# Altium PCB bricks power v1.PcbDoc
Units mm, origin at the board's own origin, x right, y up, seen from the top; angles counter-clockwise.
Board outline 90 x 45 mm, 2 copper layers (Top Layer, Bottom Layer), stack 1.6 mm thick; 3 components, 3 nets, 13 pads, 0 vias.
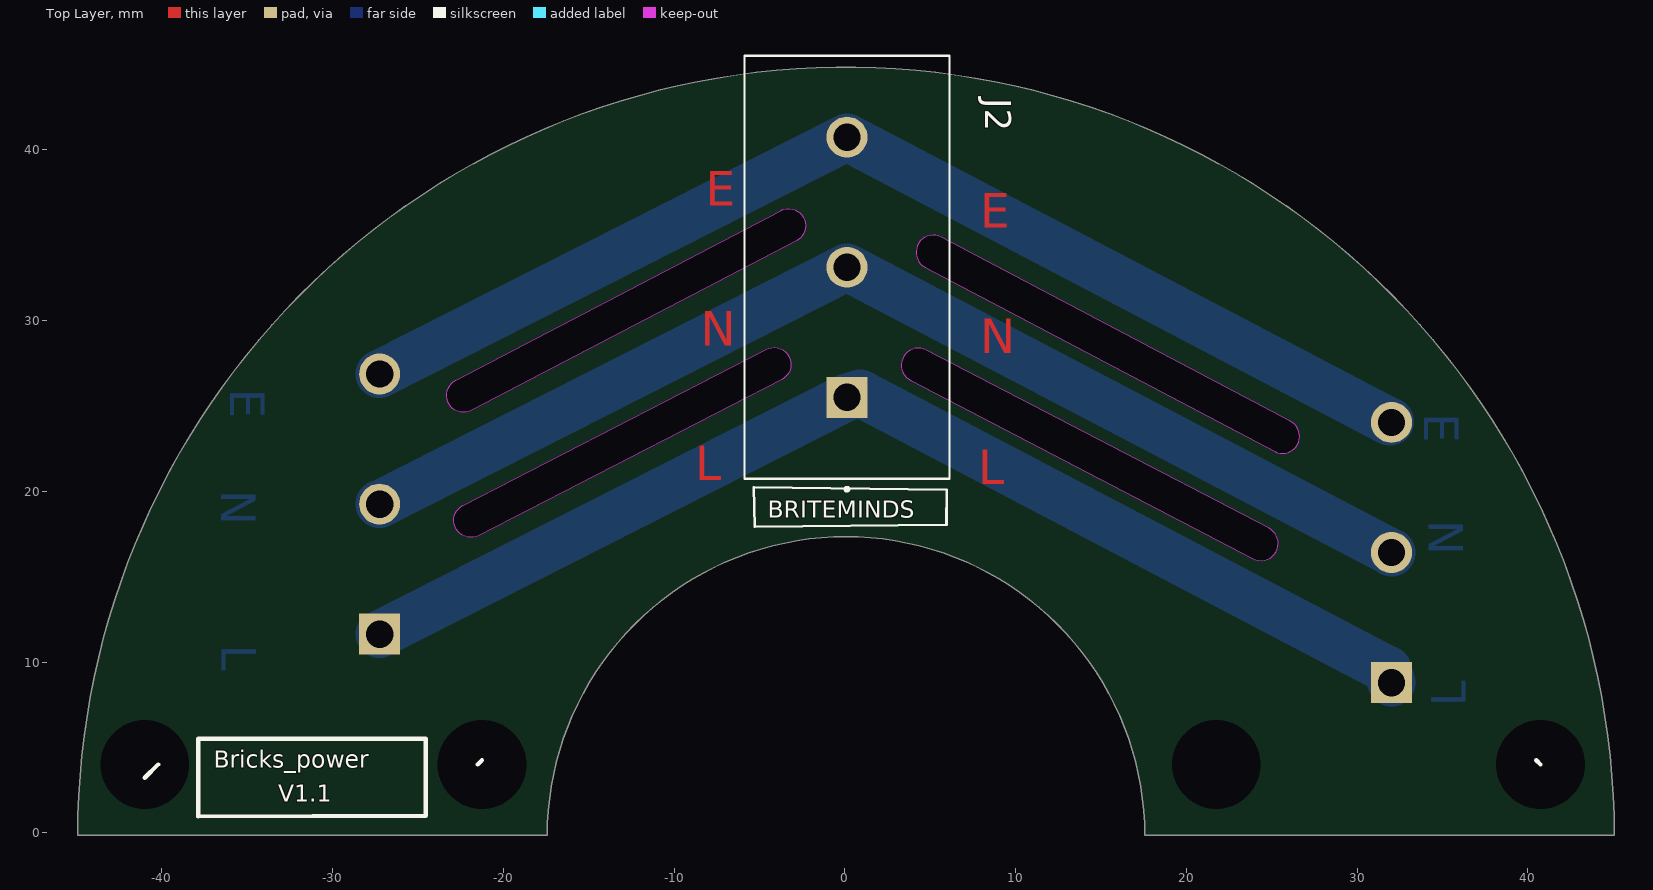
[diagram p0: Top Layer view]
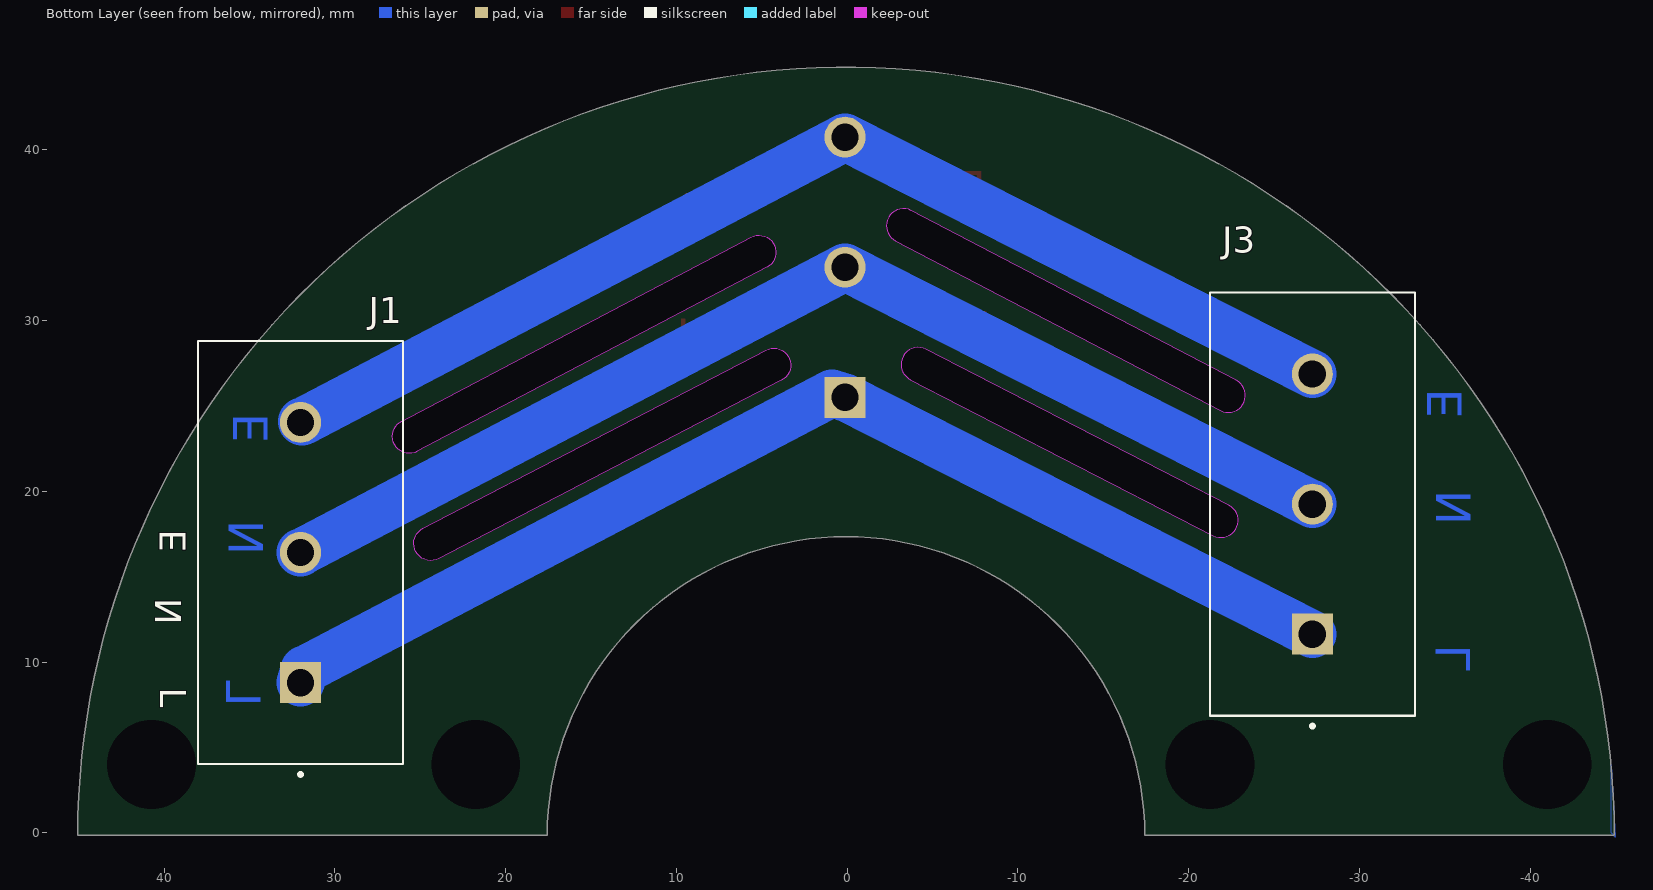
[diagram p1: Bottom Layer view, seen from below]

## Layer stack, top to bottom
Top Solder: solder mask 0.0102, Solder Resist, Dk 3.5
Top Layer: signal copper 0.3
Dielectric 1: dielectric 1, FR-4, Dk 4.8
Bottom Layer: signal copper 0.3
Bottom Solder: solder mask 0.0102, Solder Resist, Dk 3.5

## Board outline
-44.932,-0.156 -17.432,-0.156 cw(c0.068,-0.156) 17.568,-0.156 45.068,-0.156 ccw(c0.068,-0.156)
cut-out: -21.442,17.411 cw(c-21.9,18.3) -22.358,19.189 -4.616,28.322 cw(c-4.158,27.432) -3.158,27.432 cw(c-4.158,27.432) -3.7,26.543
cut-out: 3.849,26.497 23.923,16.053 ccw(c24.385,16.94) 25.385,16.94 ccw(c24.385,16.94) 24.847,17.828 4.772,28.272 ccw(c4.31,27.384)
cut-out: 4.709,33.115 25.168,22.34 ccw(c25.634,23.225) 26.634,23.225 ccw(c25.634,23.225) 26.1,24.11 5.641,34.885 ccw(c5.175,34)
cut-out: -21.862,24.738 cw(c-22.325,25.625) -22.788,26.512 -3.756,36.443 cw(c-3.293,35.556) -2.293,35.556 cw(c-3.293,35.556) -2.831,34.669

## Design rules (kind name [scope] priority, off if disabled: settings)
Clearance [All] p1: gap=0.1 ignorepadtopadclearanceinfootprint=FALSE
HoleSize [All] p1: absolutevalues=TRUE maxlimit=5.2 minlimit=0.025 maxpercent=80.000 minpercent=20.000
PolygonConnect [All] p1: connectstyle=Relief reliefconductorwidth=0.254 reliefentries=4 polygonreliefangle="90 Angle" airgapwidth=0.254
RoutingVias [All] p1: holewidth=0.711 width=1.27 viastyle="Through Hole" minholewidth=0.711 minwidth=1.27 maxholewidth=0.711 maxwidth=1.27
SolderMaskExpansion [All] p1: expansion=0.102 istentingtop=FALSE
Width [All] p1: maxlimit=2.8 minlimit=0.254 preferedwidth=2.8
29 further rules are at their usual default settings.

## Components (designator, comment, footprint, x,y, rotation, side; value= is the part's Value field where it differs from the comment)
J1 "YK3030323000G" ANYTEK_YK3030323000G 32.02,16.417 r90 bottom
J2 "YK3030323000G" ANYTEK_YK3030323000G 0.125,33.125 r90 top
J3 "YK3030323000G" ANYTEK_YK3030323000G -27.25,19.25 r90 bottom

## Footprints (in the part's own frame and the unit in brackets; to place one, negate y for a bottom-side part, rotate by r counter-clockwise, add the part's x,y. Pads: shape width x height; smd on the part's side, far side on the other; paste and mask are expansions set on the pad)
ANYTEK_YK3030323000G [mm]
  rect 2.4x2.4 / inner round 2.4 / far side rect 2.4x2.4 hole 1.6: 1(-7.62,0)
  round 2.4 hole 1.6: 2(0,0) 3(7.62,0)
  silkscreen extent -13.1,-6 12.39,6, body extent -12.39,-6 12.39,6, height 15.3

## Part data
J1 J2 J3: "3 Circuit 0.300 (7.62mm) Barrier Block Connector Screws with Captive Plate", Package=None, Check_prices=https://www.snapeda.com/parts/YK3030323000G/Amphenol/view-part/?ref=eda, MF="Amphenol Anytek", MP=YK3030323000G, SnapEDA_Link=https://www.snapeda.com/parts/YK3030323000G/Amphenol/view-part/?ref=snap

## Free pads (board coordinates)
  round 1.524 hole 5.2: 23(40.75,4) 24(21.75,4) 25(-21.25,4) 26(-41,4)

## Nets (pads, with @x,y where several pads share a name; then routed paths per layer and width w, separated by ;. In a path a pad name is that pad's centre, name@x,y a point inside that pad or via, vN(x,y) a via of type N, cw(c..) or ccw(c..) an arc to the next point about the centre after c; other vN are vias at no path point)
NetJ1_1: J1.1 J2.1 J3.1 | length 67.2
  Bottom Layer w2.8: J3.1 J2.1 0.89,25.744 31.781,9.561 J1.1
NetJ1_2: J1.2 J2.2 J3.2 | length 66.7
  Bottom Layer w2.8: J3.2 J2.2 J1.2
NetJ1_3: J1.3 J2.3 J3.3 | length 66.6
  Bottom Layer w2.8: J3.3 J2.3 J1.3@31.928,24.085

## Polygon pours and split planes (outlines as drawn)
no net on Bottom Layer "NONET_L02_P000" (solid, pour order 0): -45,-0.25 -44.75,0 -44.75,4

## Other copper
Top Layer:
  text "E" at -8.15,36.725 h2
  text "E" at 7.925,35.45 h2
  text "N" at -8.425,28.525 h2
  text "N" at 7.925,28.1 h2
  text "L" at -8.75,20.65 h2
  text "L" at 7.8,20.425 h2
Bottom Layer:
  text "E" at -36,26 h2 r270
  text "E" at 33.928,24.574 h2 r270
  text "N" at -34.5,18 h2 r90
  text "N" at 36.212,16.269 h2 r90
  text "L" at -36.5,11 h2 r270
  text "L" at 36.36,7.381 h2 r90

## Silkscreen, mask and mechanical layers (free items; w line width, h text height)
Top Overlay:
  lines w0.15: -5.337,20.246 -5.271,17.93 5.953,18.052 5.975,20.1 -5.337,20.246
  lines w0.254: -41,3.225 -40.225,4 ; -21.5,4 -21.25,4.25 ; 40.5,4.25 40.75,4 ; -37.875,0.95 -37.875,5.5 -24.55,5.5 -24.55,1 -37.875,0.95
  text "BRITEMINDS" at -4.525,18.45 h1
  text "Bricks_power" at -36.975,3.808 h1
  text "V1.1" at -33.175,1.825 h1
Bottom Overlay:
  text "E" at 38.754,17.746 h1.52 r270
  text "N" at 39.004,13.746 h1.52 r270
  text "L" at 40.246,8.496 h1.52 r90
Mechanical 1:
  lines w2: -22.325,25.625 -3.293,35.556 ; -21.9,18.3 -4.158,27.432 ; 4.31,27.384 24.385,16.94 ; 5.175,34 25.634,23.225
outline_layer:
  lines w0.254: -23.108,26.264 ccw(c-22.693,25.849) -23.279,25.849 ccw(c-21.919,25.849) -22.881,24.887 ccw(c-22.236,25.532) -22.236,24.62 -2.484,34.957 ccw(c-2.946,35.419) -2.293,35.419 ccw(c-3.38,35.419) -2.611,36.187 -2.697,36.273 ccw(c-3.39,35.579) -3.39,36.56 -23.099,26.273 ; 4.527,28.361 24.908,17.796 25.311,17.342 25.32,16.562 25.014,16.152 24.289,15.936 3.635,26.646 3.305,27.472 3.573,28.06 4.009,28.338 4.714,28.302 ; 5.136,35 26.161,24.078 26.598,23.493 26.569,22.846 26.04,22.302 25.534,22.221 25.408,22.25 4.399,33.355 4.199,34.221 4.351,34.583 4.879,34.956 5.268,35.005 ; -22.893,18.48 -22.67,18.952 -4.25,28.437 -3.751,28.437 -3.19,27.876 -3.19,26.993 -21.688,17.322 -21.757,17.322 cw(c-21.757,18.697) -22.729,17.725 -22.893,18.48
  lines w1.2: -44.932,-0.156 cw(c0.068,-0.156) 45.068,-0.156 17.568,-0.156 ccw(c0.068,-0.156) -17.432,-0.156 -44.932,-0.156